# EAGLE board pi_head_imr_sensors (EAGLE 7.6.0)
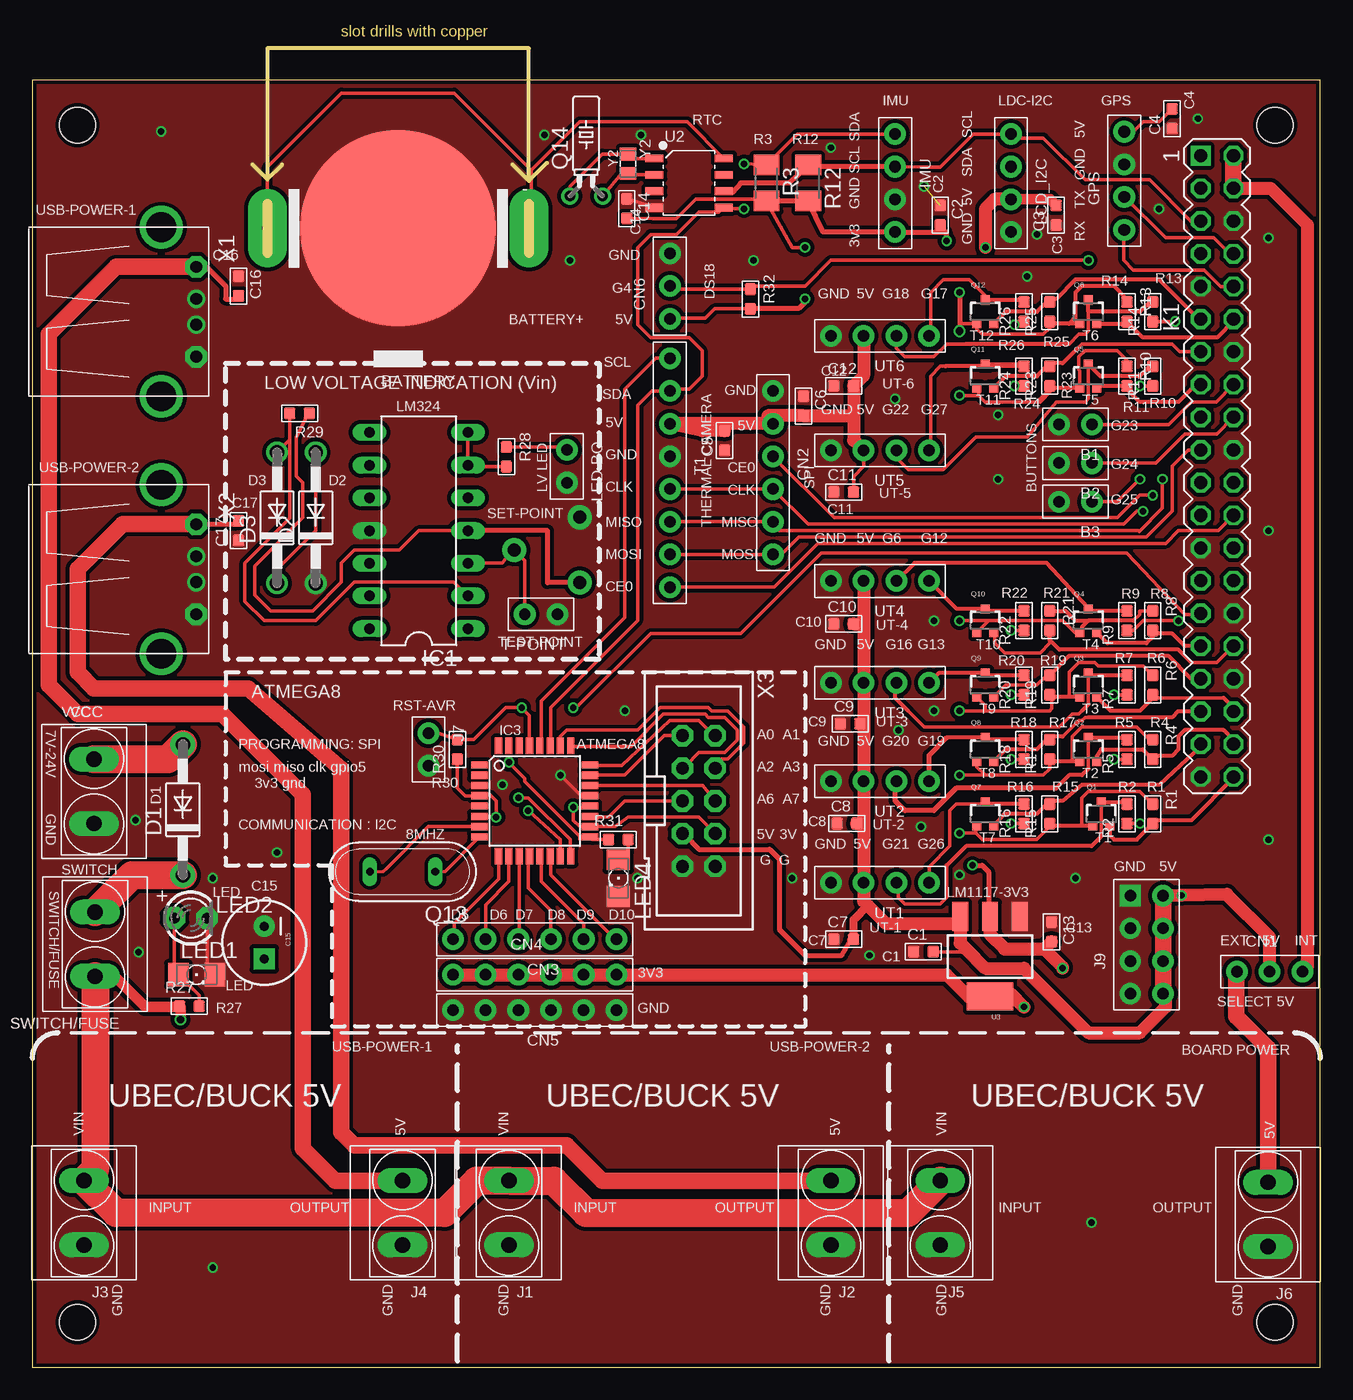
[diagram p0: board, top side]
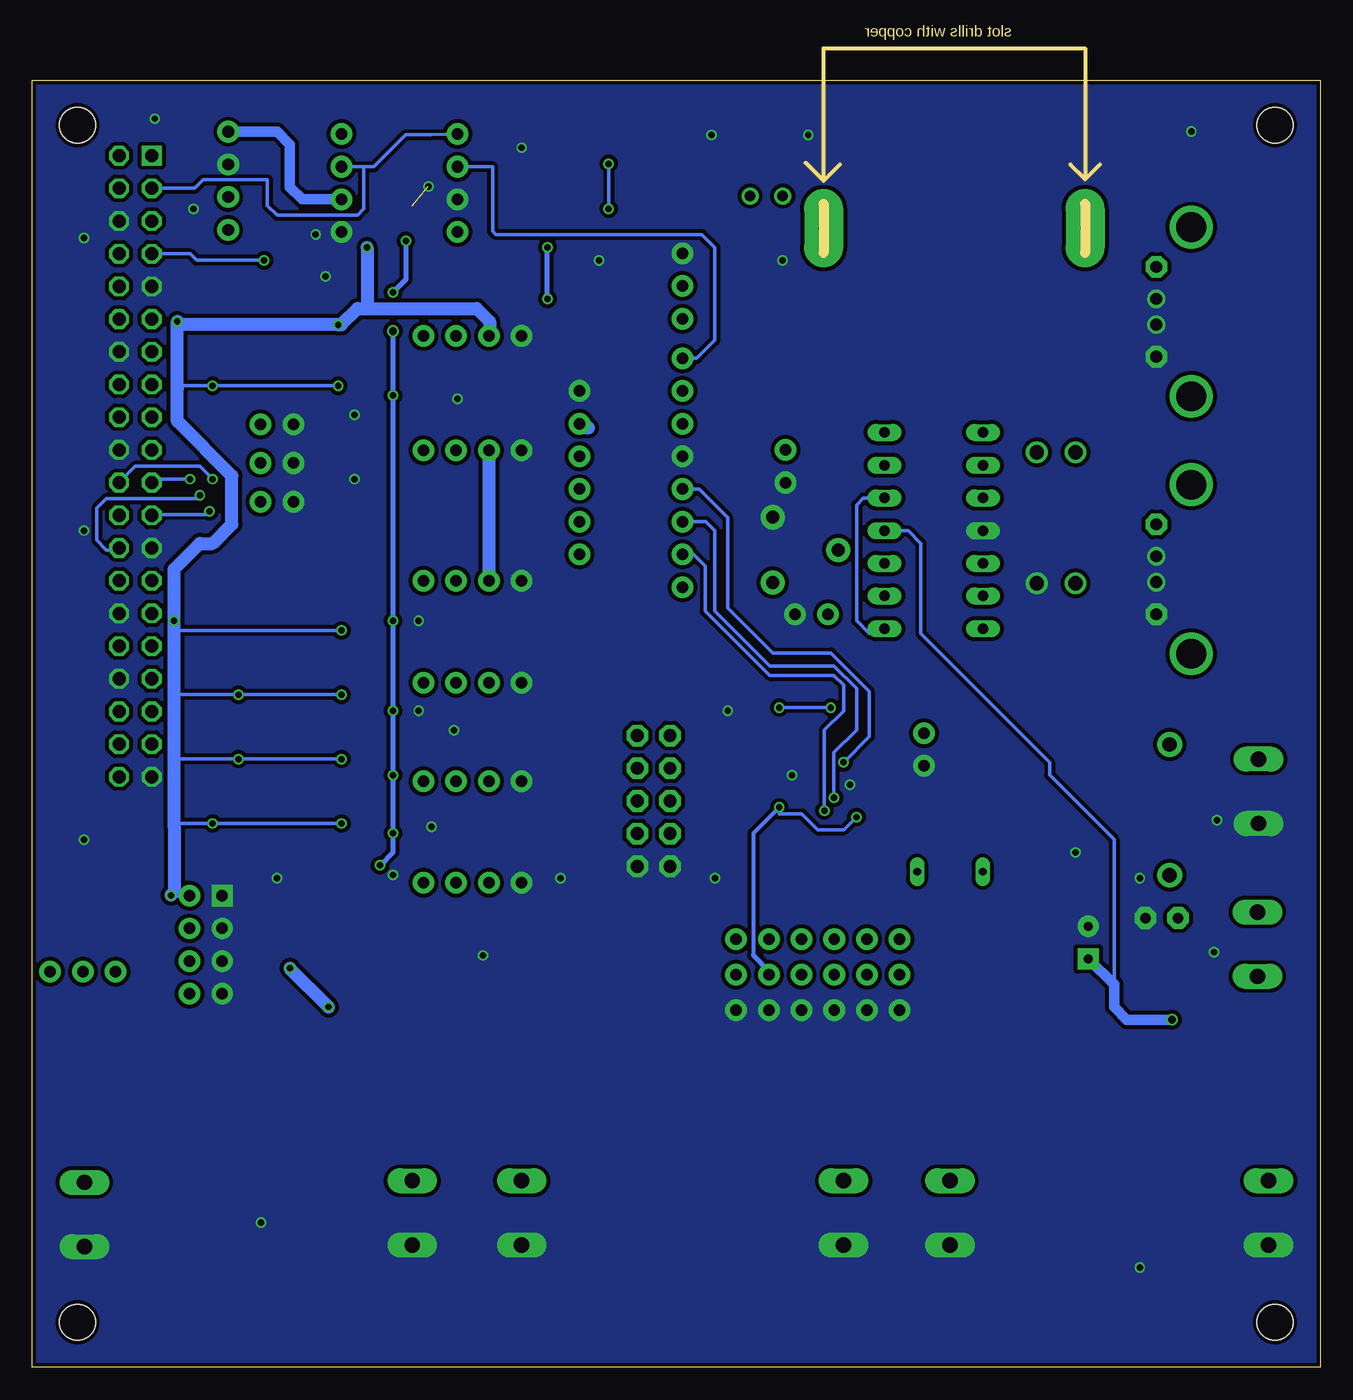
[diagram p1: board, bottom side, seen from below]

Size 100 x 100 mm. Coordinates in mm from the lower left corner, seen from the top.
Outline: 0,0 100,0 100,100 0,100 0,0
Copper layers (1*16): Top 0.035mm / dielectric 1.5mm / Bottom 0.035mm
Design rules "SeeedStudio_2layer_DRU_no_angle_20140221": minimum track width 6mil, minimum drill 12mil, track to track 6mil, track to pad 6mil, pad to pad 6mil, via to via 6mil, smd to smd 0mil, copper to edge 10mil, drill to drill 10mil, minimum pad ring 10mil, minimum via ring 6mil, stop-mask expansion 2mil, vias tented up to drill 100mil, thermal gap 10mil
Holes 2.8 mm at 3.5,96.5 3.5,3.5 96.5,3.5 96.5,96.5

## Footprints (pad centres in the part's own frame; a part is rotated, then mirrored left to right if it is on the bottom)
H2-2.54 = drill 0.889 pad 1.676: 1 0,1.27; 2 0,-1.27
BAT2P-20.32-CR2032 = smd 15.24 x 15.24: 1 0,0 | drill 0.762 pad 3.048 long: 2 -10.16,0; 3 10.16,0
C0603 = smd 0.889 x 0.889: 1 0,0.762; 2 0,-0.762
CPOL-RADIAL-100UF-25V = drill 0.7 pad 1.651 square: 1 1.27,0 | drill 0.7 pad 1.651: 2 -1.27,0
H3-2.54 = drill 0.889 pad 1.676: 1 0,2.54; 2 0,0; 3 0,-2.54
H6-2.54 = drill 0.889 pad 1.676: 1 0,6.35; 2 0,3.81; 3 0,1.27; 4 0,-1.27; 5 0,-3.81; 6 0,-6.35
DO41-10 = drill 1.118 pad 1.93: A 5.08,0; C -5.08,0
DO41-10' = drill 1.118: A 5.08,0; C -5.08,0
H4-2.54 = drill 0.9 pad 1.676: 1 0,3.81; 2 0,1.27; 3 0,-1.27; 4 0,-3.81
DIL14 = drill 0.813 long: 1 -7.62,-3.81; 2 -5.08,-3.81; 3 -2.54,-3.81; 4 0,-3.81; 5 2.54,-3.81; 6 5.08,-3.81; 7 7.62,-3.81; 8 7.62,3.81; 9 5.08,3.81; 10 2.54,3.81; 11 0,3.81; 12 -2.54,3.81; 13 -5.08,3.81; 14 -7.62,3.81
TQFP32-08 = smd 1.27 x 0.559: 1 -4.293,2.8; 2 -4.293,2; 3 -4.293,1.2; 4 -4.293,0.4; 5 -4.293,-0.4; 6 -4.293,-1.2; 7 -4.293,-2; 8 -4.293,-2.8; 17 4.293,-2.8; 18 4.293,-2; 19 4.293,-1.2; 20 4.293,-0.4; 21 4.293,0.4; 22 4.293,1.2; 23 4.293,2; 24 4.293,2.8 | smd 0.559 x 1.27: 9 -2.8,-4.293; 10 -2,-4.293; 11 -1.2,-4.293; 12 -0.4,-4.293; 13 0.4,-4.293; 14 1.2,-4.293; 15 2,-4.293; 16 2.8,-4.293; 25 2.8,4.293; 26 2,4.293; 27 1.2,4.293; 28 0.4,4.293; 29 -0.4,4.293; 30 -1.2,4.293; 31 -2,4.293; 32 -2.8,4.293
H2-5.0-10.5X8.0MM = drill 1.2 pad 1.93 long: 1 0,2.5; 2 0,-2.5
H2X4-2.54 = drill 0.889 pad 1.651 square: 1 -1.27,3.81 | drill 0.889 pad 1.651: 2 -1.27,1.27; 3 -1.27,-1.27; 4 -1.27,-3.81; 5 1.27,-3.81; 6 1.27,-1.27; 7 1.27,1.27; 8 1.27,3.81
PIN_20X2 = drill 1.016 square: 1 -24.13,-1.27 | drill 1.016 octagon: 2 -24.13,1.27; 3 -21.59,-1.27; 4 -21.59,1.27; 5 -19.05,-1.27; 6 -19.05,1.27; 7 -16.51,-1.27; 8 -16.51,1.27; 9 -13.97,-1.27; 10 -13.97,1.27; 11 -11.43,-1.27; 12 -11.43,1.27; 13 -8.89,-1.27; 14 -8.89,1.27; 15 -6.35,-1.27; 16 -6.35,1.27; 17 -3.81,-1.27; 18 -3.81,1.27; 19 -1.27,-1.27; 20 -1.27,1.27; 21 1.27,-1.27; 22 1.27,1.27; 23 3.81,-1.27; 24 3.81,1.27; 25 6.35,-1.27; 26 6.35,1.27; 27 8.89,-1.27; 28 8.89,1.27; 29 11.43,-1.27; 30 11.43,1.27; 31 13.97,-1.27; 32 13.97,1.27; 33 16.51,-1.27; 34 16.51,1.27; 35 19.05,-1.27; 36 19.05,1.27; 37 21.59,-1.27; 38 21.59,1.27; 39 24.13,-1.27; 40 24.13,1.27
LED_1206 = smd 1.6 x 1.803: A -1.422,0; C 1.422,0
LED3MM = drill 0.813 pad 1.676 octagon: A -1.27,0; K 1.27,0
SOT323 = smd 0.7 x 0.7: 1 -0.65,-0.925; 2 0.65,-0.925; 3 0,0.925
QS = drill 0.61 long: 1 -2.54,0; 2 2.54,0
TC26H = drill 0.813: 1 -1.27,0; 2 1.27,0
R0603 = smd 0.889 x 0.889: 1 0,0.762; 2 0,-0.762
M1206 = smd 1.6 x 2: 1 -1.4,0; 2 1.4,0
TRIM_POT = drill 1 pad 1.88: 1 5.08,0; 2 0,2.54; 3 0,-2.54
H8-2.54 = drill 0.889 pad 1.676: 1 0,8.89; 2 0,6.35; 3 0,3.81; 4 0,1.27; 5 0,-1.27; 6 0,-3.81; 7 0,-6.35; 8 0,-8.89
SOIC8-1.27-5X4MM = smd 0.6 x 1.4: 1 -1.905,-2.7; 2 -0.635,-2.7; 3 0.635,-2.7; 4 1.905,-2.7; 5 1.905,2.7; 6 0.635,2.7; 7 -0.635,2.7; 8 -1.905,2.7
SOT223 = smd 1.219 x 2.235: 1 -2.311,-3.099; 2 0,-3.099; 3 2.311,-3.099 | smd 3.6 x 2.2: 4 0,3.099
USB-A-H = drill 0.914: D+ 2.718,-1.003; D- 2.718,1.003 | drill 0.914 pad 1.676 octagon: GND 2.718,-3.493; VBUS 2.718,3.493 | drill 2.311: P$5 0,-6.566; P$6 0,6.566
PAK100/2500-10 = drill 1 pad 1.676 octagon: 1 -5.08,-1.27; 2 -5.08,1.27; 3 -2.54,-1.27; 4 -2.54,1.27; 5 0,-1.27; 6 0,1.27; 7 2.54,-1.27; 8 2.54,1.27; 9 5.08,-1.27; 10 5.08,1.27
X2-SMD-L2.0X1.2X0.55MM = smd 1 x 1.25: 1 -0.75,0; 2 0.75,0

## Placement (x,y rotation side)
B1  2P-2.54  [H2-2.54]  81,73.25 90 top
B2  2P-2.54  [H2-2.54]  81,70.25 90 top
B3  2P-2.54  [H2-2.54]  81,67.25 90 top
BATTERY  cr2032  [BAT2P-20.32-CR2032]  28.4,88.49 180 top
C1  1nf  [C0603]  69.19,32.29 90 top
C2  1nf  [C0603]  70.5,89.5 0 top
C3  1nf  [C0603]  79.5,89.5 180 top
C4  1nf  [C0603]  88.5,97 180 top
C5  1nf  [C0603]  53.75,72 180 top
C6  1nf  [C0603]  59.88,74.68 0 top
C7  1nf  [C0603]  63,33.25 90 top
C8  1nf  [C0603]  63.25,42.25 90 top
C9  1nf  [C0603]  63.5,50 90 top
C10  1nf  [C0603]  63,57.75 90 top
C11  1nf  [C0603]  63,68 90 top
C12  1nf  [C0603]  63,76.25 90 top
C13  1nf  [C0603]  79.15,33.83 0 top
C14  1nf  [C0603]  46.15,90.02 0 top
C15  [CPOL-RADIAL-100UF-25V]  18,33 270 top
C16  1nf  [C0603]  16,84 0 top
C17  1nf  [C0603]  16,65 180 top
CN1  3p-2.54  [H3-2.54]  96.08,30.74 270 top
CN2  6p-2.54  [H6-2.54]  57.5,69.5 180 top
CN3  6p-2.54  [H6-2.54]  39,33.25 90 top
CN4  6p-2.54  [H6-2.54]  39,30.5 270 top
CN5  6p-2.54  [H6-2.54]  39,27.75 90 top
CN6  3p-2.54  [H3-2.54]  49.5,84 0 top
D1  1N4004  [DO41-10]  11.68,43.31 90 top
D2  1N4004  [DO41-10']  22,66 90 top
D3  1N4004  [DO41-10']  19,66 90 top
GPS  4p-2.54  [H4-2.54]  84.79,92.18 0 top
IC1  LM324P  [DIL14]  30,65 90 top
IC3  MEGA8-AI  [TQFP32-08]  39,44 0 top
IMU  4p-2.54  [H4-2.54]  67,92 180 top
J1  GREEN-2P-5.0  [H2-5.0-10.5X8.0MM]  37,12 180 top
J2  GREEN-2P-5.0  [H2-5.0-10.5X8.0MM]  62,12 180 top
J3  GREEN-2P-5.0  [H2-5.0-10.5X8.0MM]  4,12 180 top
J4  GREEN-2P-5.0  [H2-5.0-10.5X8.0MM]  28.75,12 180 top
J5  GREEN-2P-5.0  [H2-5.0-10.5X8.0MM]  70.5,12 180 top
J6  GREEN-2P-5.0  [H2-5.0-10.5X8.0MM]  95.96,11.87 180 top
J7  2p-2.54  [H2-2.54]  30.75,48 180 top
J9  2X4P-2.54  [H2X4-2.54]  86.53,32.83 0 top
K1  PIN20X2  [PIN_20X2]  92,70 270 top
LCD_I2C  4p-2.54  [H4-2.54]  76,92 180 top
LED1  [LED_1206]  12.75,30.5 0 top
LED2  [LED3MM]  12.3,34.91 0 top
LED4  [LED_1206]  45.5,38 270 top
LED-BO  2p-2.54  [H2-2.54]  41.5,70 180 top
Q1  MOSFET-NCHANNEL2N7002PW  [SOT323]  83,43 0 top
Q2  MOSFET-NCHANNEL2N7002PW  [SOT323]  82,48 0 top
Q3  MOSFET-NCHANNEL2N7002PW  [SOT323]  82,53 0 top
Q4  MOSFET-NCHANNEL2N7002PW  [SOT323]  82,58 0 top
Q5  MOSFET-NCHANNEL2N7002PW  [SOT323]  82,77 0 top
Q6  MOSFET-NCHANNEL2N7002PW  [SOT323]  82,82 0 top
Q7  MOSFET-NCHANNEL2N7002PW  [SOT323]  74,43 0 top
Q8  MOSFET-NCHANNEL2N7002PW  [SOT323]  74,48 0 top
Q9  MOSFET-NCHANNEL2N7002PW  [SOT323]  74,53 0 top
Q10  MOSFET-NCHANNEL2N7002PW  [SOT323]  74,58 0 top
Q11  MOSFET-NCHANNEL2N7002PW  [SOT323]  74,77 0 top
Q12  MOSFET-NCHANNEL2N7002PW  [SOT323]  74,82 0 top
Q13  [QS]  28.75,38.5 180 top
Q14  [TC26H]  43,91 0 top
R1  270K 1/10W  [R0603]  87,43 180 top
R2  270K 1/10W  [R0603]  85,43 0 top
R3  R  [M1206]  57,92 270 top
R4  270K 1/10W  [R0603]  87,48 180 top
R5  270K 1/10W  [R0603]  85,48 0 top
R6  270K 1/10W  [R0603]  87,53 180 top
R7  270K 1/10W  [R0603]  85,53 0 top
R8  270K 1/10W  [R0603]  87,58 180 top
R9  270K 1/10W  [R0603]  85,58 0 top
R10  270K 1/10W  [R0603]  85,77 180 top
R11  270K 1/10W  [R0603]  87,77 0 top
R12  R  [M1206]  60.25,92 270 top
R13  270K 1/10W  [R0603]  85,82 180 top
R14  270K 1/10W  [R0603]  87,82 0 top
R15  270K 1/10W  [R0603]  79,43 0 top
R16  270K 1/10W  [R0603]  77,43 0 top
R17  270K 1/10W  [R0603]  79,48 0 top
R18  270K 1/10W  [R0603]  77,48 0 top
R19  270K 1/10W  [R0603]  79,53 0 top
R20  270K 1/10W  [R0603]  77,53 0 top
R21  270K 1/10W  [R0603]  79,58 180 top
R22  270K 1/10W  [R0603]  77,58 0 top
R23  270K 1/10W  [R0603]  79,77 0 top
R24  270K 1/10W  [R0603]  77,77 0 top
R25  270K 1/10W  [R0603]  79,82 0 top
R26  270K 1/10W  [R0603]  77,82 0 top
R27  1k  [R0603]  12.18,28.05 270 top
R28  1k  [R0603]  36.81,70.74 180 top
R29  1k  [R0603]  20.74,74.11 90 top
R30  1k  [R0603]  33,48 0 top
R31  1k  [R0603]  45.5,41 270 top
R32  1k  [R0603]  55.75,83 180 top
RV1  [TRIM_POT]  42.5,63.5 180 top
SWITCH/FUSE  GREEN-2P-5.0  [H2-5.0-10.5X8.0MM]  4.87,32.87 180 top
T1  YELLOW-8P-2.54  [H8-2.54]  49.5,69.5 180 top
T-POINT  2P-2.54  [H2-2.54]  39.5,58.5 90 top
U2  DS13337S+-SOIC8  [SOIC8-1.27-5X4MM]  51,92 270 top
U3  [SOT223]  74.36,31.92 180 top
UT1  4p-2.54  [H4-2.54]  65.82,37.64 90 top
UT2  4p-2.54  [H4-2.54]  65.82,45.54 90 top
UT3  4p-2.54  [H4-2.54]  65.82,53.19 90 top
UT4  4p-2.54  [H4-2.54]  65.82,61.09 90 top
UT5  4p-2.54  [H4-2.54]  65.82,71.24 90 top
UT6  4p-2.54  [H4-2.54]  65.82,80.14 90 top
VCC  GREEN-2P-5.0  [H2-5.0-10.5X8.0MM]  4.77,44.75 0 top
X1  [USB-A-H]  10,82 0 top
X2  [USB-A-H]  10,62 0 top
X3  2510-  [PAK100/2500-10]  51.75,44 270 top
Y2  3.2768KHZ  [X2-SMD-L2.0X1.2X0.55MM]  46.25,93.5 270 top

## Library data of the parts
B1-B3 T-POINT = Seeed-Connector -2016; MPN: P125-1102A0BS116A3
BATTERY = Seeed-OPL-Connector
C1 C2 = Seeed-Capacitor-2016; MPN: CC0603KRX7R9BB102
C3-C14 C16 C17 = Seeed-Capacitor-2016; MPN: GRM1885C1H102JA01D
C15 = SparkFun-Capacitors
CN1 CN6 J1-J6 J9 SWITCH/FUSE VCC = Seeed-Connector -2016
CN2-CN5 = Seeed-Connector -2016; MPN: F185-1106A1BSYC1
D1 LED2 R3 R12 = adafruit
D2 D3 = diode
GPS IMU LCD_I2C UT1-UT6 = Seeed-Connector -2016; MPN: F185-1104A1BSYA1
IC1 = lm324
IC3 = atmel; MPN: ATMEGA8-16AU; OC_FARNELL: 9171371; OC_NEWARK: 73M8863
J7 LED-BO = Seeed-Connector -2016; MPN: P125-1102A0BS116A1
K1 = FLYFISH
LED1 LED4 = eagle-ltspice; SPICEMODEL: NONE; SPICEPREFIX: D; SPICETYPE: diode
Q1-Q12 = SparkFun-DiscreteSemi; PROD_ID: TRANS-11151
Q13 = special
Q14 = crystal; OC_FARNELL: unknown; OC_NEWARK: unknown
R1 R2 R4-R11 R13-R26 = Seeed-OPL-Resistor; MPN: RC0603FR-07270KL
R27-R32 = Seeed-Resistor-2016; MPN: RC0603JR-070RL
RV1 = SparkFun-Electromechanical
T1 = Seeed-Connector -2016; MPN: F185-1108A1BSYC1
U2 = Seeed-OPL-ic; MPN: DS1337S+
U3 = SparkFun-PowerIC; PROD_ID: VREG-08170
X1 X2 = con-usb-3
X3 = con-3m; MF: 3M; MPN: 2510-6002UB; OC_FARNELL: 9838244; OC_NEWARK: 46F4725
Y2 = Seeed-OPL-crystal-osctllator; MPN: FC-12M

## Nets
3V3: C2.2 C13.2 C14.2 CN4.1 CN4.2 CN4.3 CN4.4 CN4.5 CN4.6 CN6.3 IC3.4 IC3.6 IC3.18 IC3.20 IMU.1 Q1.1 Q2.1 Q3.1 Q4.1 Q5.1 Q6.1 Q7.1 Q8.1 Q9.1 Q10.1 Q11.1 Q12.1 R1.2 R3.2 R4.2 R6.2 R8.2 R10.2 R12.2 R13.2 R15.2 R17.2 R19.2 R21.2 R23.2 R25.2 R30.2 R32.1 U3.2 U3.4 X3.8
5V: C1.2 C3.2 C4.2 C5.2 C6.2 C7.2 C8.2 C9.2 C10.2 C11.2 C12.2 CN1.2 CN2.5 GPS.1 J9.5 J9.6 J9.7 J9.8 LCD_I2C.2 R2.2 R5.2 R7.2 R9.2 R11.2 R14.2 R16.2 R18.2 R20.2 R22.2 R24.2 R26.2 T1.6 U3.3 UT1.2 UT2.2 UT3.2 UT4.2 UT5.2 UT6.2 X3.7
ADC0: IC3.23 X3.1
ADC1: IC3.24 X3.2
ADC2: IC3.25 X3.3
ADC3: IC3.26 X3.4
ADC6: IC3.19 X3.5
ADC7: IC3.22 X3.6
BROWN-OUT: IC1.6 IC1.7 R28.1
BUCK-5V: CN1.3 J6.2
BUTT1: B1.2 K1.16
BUTT2: B2.2 K1.18
BUTT3: B3.2 K1.22
CE0: K1.24 T1.1
CE1: CN2.4 K1.26
CLK: CN2.3 IC3.17 K1.23 R31.2 T1.4
D5: CN3.1 IC3.9
D6: CN3.2 IC3.10
D7: CN3.3 IC3.11
D8: CN3.4 IC3.12
D9: CN3.5 IC3.13
D10: CN3.6 IC3.14
DS18: CN6.2 K1.7 R32.2
GND: B1.1 B2.1 B3.1 BATTERY.1 C1.1 C2.1 C3.1 C4.1 C5.1 C6.1 C7.1 C8.1 C9.1 C10.1 C11.1 C12.1 C13.1 C14.1 C15.2 C16.1 C17.1 CN2.6 CN5.1 CN5.2 CN5.3 CN5.4 CN5.5 CN5.6 CN6.1 D2.C GPS.2 IC1.11 IC3.3 IC3.5 IC3.21 IMU.2 J1.1 J2.1 J3.1 J4.1 J5.1 J6.1 J7.1 J9.1 J9.2 J9.3 J9.4 K1.6 K1.9 K1.14 K1.20 K1.25 K1.30 K1.34 K1.39 LCD_I2C.1 LED1.C LED2.K LED4.C LED-BO.1 RV1.3 T1.5 T-POINT.2 U2.4 U3.1 UT1.1 UT2.1 UT3.1 UT4.1 UT5.1 UT6.1 VCC.2 X1.D+ X1.D- X1.GND X2.D+ X2.D- X2.GND X3.9 X3.10
HUB-5V: C17.2 J2.2 X2.VBUS
MISO: CN2.2 IC3.16 K1.21 T1.3
MOSI: CN2.1 IC3.15 K1.19 T1.2
N$1: LED4.A R31.1
N$2: D1.A VCC.1
N$3: D1.C SWITCH/FUSE.2
N$4: D2.A D3.C
N$6: D3.A IC1.2 R29.1
N$7: IC1.3 RV1.1 T-POINT.1
N$8: IC1.1 IC1.5
N$9: BATTERY.2 BATTERY.3 U2.8
N$10: LED-BO.2 R28.2
N$11: LED1.A LED2.A R27.1
N$12: Q14.1 U2.1 Y2.1
N$13: IC3.7 Q13.2
N$14: IC3.8 Q13.1
N$15: Q14.2 U2.2 Y2.2
PI-5V: CN1.1 K1.2 K1.4
RASPI-5V: C16.2 J4.2 X1.VBUS
RST: IC3.29 J7.2 K1.29 R30.1
RX: GPS.4 K1.10
SCL: IC3.28 IMU.3 K1.5 LCD_I2C.4 R12.1 T1.8 U2.6
SDA: IC3.27 IMU.4 K1.3 LCD_I2C.3 R3.1 T1.7 U2.5
TX: GPS.3 K1.8
UT11-IN: K1.40 Q1.2 R1.1
UT11-OUT: Q1.3 R2.1 UT1.3
UT12-IN: K1.37 Q7.2 R15.1
UT12-OUT: Q7.3 R16.1 UT1.4
UT21-IN: K1.38 Q2.2 R4.1
UT21-OUT: Q2.3 R5.1 UT2.3
UT22-IN: K1.35 Q8.2 R17.1
UT22-OUT: Q8.3 R18.1 UT2.4
UT31-IN: K1.36 Q3.2 R6.1
UT31-OUT: Q3.3 R7.1 UT3.3
UT32-IN: K1.33 Q9.2 R19.1
UT32-OUT: Q9.3 R20.1 UT3.4
UT41-IN: K1.31 Q4.2 R8.1
UT41-OUT: Q4.3 R9.1 UT4.3
UT42-IN: K1.32 Q10.2 R21.1
UT42-OUT: Q10.3 R22.1 UT4.4
UT51-IN: K1.15 Q5.2 R10.1
UT51-OUT: Q5.3 R11.1 UT5.3
UT52-IN: K1.13 Q11.2 R23.1
UT52-OUT: Q11.3 R24.1 UT5.4
UT61-IN: K1.12 Q6.2 R13.1
UT61-OUT: Q6.3 R14.1 UT6.3
UT62-IN: K1.11 Q12.2 R25.1
UT62-OUT: Q12.3 R26.1 UT6.4
VIN: C15.1 IC1.4 J1.2 J3.2 J5.2 R27.2 R29.2 RV1.2 SWITCH/FUSE.1

## Tracks (layer width: path | path; a pad name or v marks a point on that pad's centre or on a via)
3V3  (via drill 0.5, 0.6)
  Top 0.254: 74.28,58 80,58 80.92,57.08 Q4.1 | 74.28,58 Q10.1 | 79.16,52.08 79.16,51.16 79,51 74,51 | 74,51 74,51.42 Q9.1 | Q8.1 73.35,46.65 74,46 | 74,46 78.5,46 79,46.5 R17.2 | R15.2 79,42 78,41 73.75,41 73.25,41.5 | 73.25,41.5 73.25,41.98 Q7.1 | R25.2 79,80.75 78.5,80.25 73.75,80.25 73.35,80.65 Q12.1 72.08,81.08 v72,80.5 | 79.16,76.08 79.16,75.91 78.25,75 78,75 | 73.5,75.5 73.5,75.92 Q11.1 | 74.25,35.13 U3.2 | 73.25,41.5 v72,41.5 | 74,46 v72,46 | 74,51 v72,51 | 74.28,58 v72,58 | Q5.1 81.35,77.4 81.25,77.5 81.25,78.5 81.75,79 84.25,79 85,78.25 R10.2 | R23.2 79,76 78,75 | 78,75 74,75 73.5,75.5 | 73.5,75.5 v72,75.5 | R1.2 86.99,43.76 86,44.75 82,44.75 81.5,44.25 81.5,42.08 | R4.2 86.74,48.76 85.75,49.75 81.5,49.75 80.75,49 80.75,47.08 | R6.2 86.99,53.76 86.25,54.5 82.75,54.5 82.5,54.75 81.25,54.75 80.5,54 80.5,52.08 | 86.76,58.76 86.01,58.76 86,58.75 86,58.5 85.5,58 | 70.95,88.19 C2.2 | 70.95,87.55 v71,87.5 | C14.2 48.16,89.25 50,89.25 51.5,90.75 58,90.75 58.15,90.6 R3.2 59,87 v60,87 | v42,43.5 42,42.5 42.5,42 IC3.18 45.25,42 46.25,42.75 51.75,42.75 53.02,41.48 X3.8 | v36,42.75 34.76,42.75 IC3.6 35.95,42.8 v36,42.75 | v36,42.75 36,44 35.5,44.5 34.81,44.5 IC3.4 33.6,44.4 33,45 R30.2 | R32.1 52.99,82.24 52.25,81.5 49.54,81.5 CN6.3
  Top 0.305: Q1.1 81.5,42.08 79.16,42.08 R15.2 | Q2.1 80.75,47.08 79.16,47.08 R17.2 | Q3.1 80.5,52.08 79.16,52.08 R19.2 | R8.2 86.76,58.76 | 85.5,58 82,58 | 82,58 81.5,57.5 81.5,57.23 Q4.1 | R21.2 80.24,58.76 81,58 82,58 | Q5.1 79.16,76.08 R23.2 | Q6.1 80.5,81.08 | 80.5,81.08 79.16,81.08 R25.2 | R13.2 85,83 84,84 81.5,84 81,83.5 81,81.58 80.5,81.08 | v42,43.5 43.19,43.5
  Top 0.406: 74.25,35.13 74.25,38.5 73.75,39 v73,39 | v72,83.5 v72,80.5 | 70.95,87.55 70.95,88.19 IMU.1 61.41,88.19 R12.2 R3.2 | 43.19,43.5 IC3.20 | v60,83 60,82.75 59.5,82.25 58.76,82.25 R32.1
  Top 1.016: U3.2 74.36,33.64 75.5,32.5 78.58,32.5 | 78.58,32.5 C13.2 | CN4.6 CN4.5 CN4.4 CN4.3 CN4.2 | CN4.2 CN4.1 | 74.18,29 73,29 72.75,28.75 71,30.5 CN4.2 | 74.18,29 U3.4 | 74.18,29 76,29 v77,28 | v80,31 80,31.08 78.58,32.5
  Bottom 0.254: v36,42.75 37,41.75 39,41.75 40.25,43 42,43 v42,43.5
  Bottom 0.305: 44,32 44,41.5 v42,43.5
  Bottom 0.406: v72,80.5 v72,75.5 v72,58 v72,51 v72,46 v72,41.5 72,40 v73,39 | v71,87.5 71,84.5 v72,83.5 | CN4.2 42.81,30.81 44,32 | v60,83 v60,87
  Bottom 1.016: v77,28 v80,31
5V  (via drill 0.5)
  Top 0.254: R14.2 88.74,81.24 v88.75,81.25 | R26.2 76.49,81.24 v76.25,81 | R9.2 85.49,57.24 86.25,58 v89,58 | R22.2 76.01,57.24 v76,57.25 | R7.2 84.01,52.24 v84,52.25 | R20.2 76.26,52.24 v76,52.25 | R18.2 76.01,47.24 v76,47.25 | R5.2 84.01,47.24 v84,47.25 | R16.2 76.01,42.24 v76,42.25 | R2.2 85.99,42.24 v86,42.25 | R24.2 76.26,76.24 v76.25,76.25 | R11.2 86.01,76.24 v86,76.25 | C11.2 63.76,69.21 64.55,70 UT5.2 | C1.2 72.29,32.29 72.5,32.5 | GPS.1 85.49,95.99 86.25,96.75 87.49,96.75 C4.2 | C9.2 64.26,52.9 UT3.2
  Top 0.406: X3.7 50.73,41.27 51.75,40.25 57.25,40.25 58,39.5 58,34 60,32 62.86,32 63.56,33.2
  Top 0.61: 64.88,35.88 63.76,34.76 C7.2 63.56,33.2
  Top 0.813: LCD_I2C.2 79.03,90.73 C3.2
  Top 1.016: J9.5 88,28.82 88,28 86,26 82,26 77,31 74,31 72.5,32.5 72.05,32.95 U3.3 71.98,34.95 | C5.2 52.05,72.76 T1.6 CN2.5 57.11,73.92 C6.2 63.68,73.92 63.76,74 | CN1.2 96.08,33.42 92.75,36.75 v89.25,36.66 J9.8 | LCD_I2C.2 74.73,90.73 74,90 v74,87 | UT6.2 64.55,77.04 C12.2 63.76,74 | 63.76,74 63.76,72.03 UT5.2 | UT4.2 64.55,58 | 64.55,58 UT3.2 UT2.2 64.55,42 | C10.2 64.3,57.75 64.55,58 | 64.55,42 UT1.2 64.55,36.2 64.88,35.88 66.25,34.5 71.75,34.5 | C8.2 64.3,42.25 64.55,42 | 71.75,34.5 72,34.25 72,34.5 71.75,34.5
  Top 1.27: J9.5 J9.6 J9.7 J9.8
  Bottom 0.254: 88.5,81 v88.75,81.25 | v76,57.25 89,57.25 | v76,52.25 v84,52.25 88.75,52.25 89,52 | v76,47.25 v84,47.25 89,47.25 | v76,42.25 v86,42.25 88.75,42.25 89,42 | v76.25,76.25 v86,76.25 | v86,76.25 88.75,76.25 | v86,76.25 88.5,76.25 88.75,76
  Bottom 0.813: GPS.1 80.99,95.99 80,95 80,91.7 79.03,90.73 LCD_I2C.2
  Bottom 1.016: 57,73 56.81,73 CN2.5 | v88.75,81.25 88.75,76.25 88.75,76 88.75,73.5 84.5,69.25 84.5,65.5 86,64 87,64 89,62 v89,58 89,57.25 89,52 89,47.25 89,42 89,36.91 v89.25,36.66 | 88.5,81 v76.25,81 76,81 74.75,82.25 74,82.25 | v74,87 74,82.25 | 74,82.25 65.5,82.25 64.5,81.25 64.5,80.19 UT6.2 | UT5.2 UT4.2
ADC0
  Top 0.254: X3.1 49.08,49.08 46,46 IC3.23
ADC1
  Top 0.254: X3.2 52.92,49.08 51.75,50.25 49.5,50.25 45.75,46.75 43.34,46.75 IC3.24
ADC2
  Top 0.254: X3.3 50.73,46.73 51.75,47.75 53.75,47.75 54.75,48.75 54.75,49.5 53.75,50.5 52.5,50.5 52.25,50.75 49,50.75 46.5,48.25 41.84,48.25 IC3.25
ADC3
  Top 0.254: IC3.26 41,49 41.5,49.5 47,49.5 48.75,51.25 52.5,51.25 52.75,51 54,51 55.25,49.75 55.25,48.5 54,47.25 53.5,47.25 53.25,47 53.25,46.56 X3.4
ADC6
  Top 0.254: X3.5 46,44 44.75,42.75 43.34,42.75 IC3.19
ADC7
  Top 0.254: IC3.22 52.07,45.2 X3.6
BROWN-OUT
  Top 0.254: IC1.7 IC1.6 33.91,69.98 R28.1
BUCK-5V
  Top 1.27: J6.2 95.96,24.79 93.5,27.25 93.5,30.7 CN1.3
BUTT1
  Top 0.254: B1.2 88.25,73.25 90,75 91.92,75 K1.16
BUTT2
  Top 0.254: B2.2 87.25,70.25 89.5,72.5 91.96,72.5 K1.18
BUTT3  (via drill 0.5)
  Top 0.254: B3.2 84.25,67.25 v86,69
  Bottom 0.254: v86,69 87,70 92,70 K1.22
CE0
  Top 0.254: T1.1 57.61,60.61 61,64 88,64 89,65 92.08,65 K1.24
CE1  (via drill 0.5)
  Top 0.254: CN2.4 62.27,66 84.25,66 86,67.75 v87,67.75
  Bottom 0.254: K1.26 93.42,63.5 94.25,63.5 95,64.25 95,66.75 94.25,67.5 87.25,67.5 v87,67.75
CLK  (via drill 0.5)
  Top 0.254: T1.4 CN2.3 60.23,65.5 84.75,65.5 85.75,66.5 v86.25,66.5 | 37,46.75 v37,47 38.25,45.75 38.25,45.5 42.5,41.25 | 42.5,41.25 43.24,41.25 IC3.17 43.49,41 R31.2 | 42.5,41.25 42.5,41.01
  Bottom 0.254: v86.25,66.5 86.5,66.25 90.67,66.25 K1.23 | T1.4 48.23,68.23 46,66 46,59 42.5,55.5 38,55.5 35,52.5 35,49 v37,47
D5
  Top 0.254: IC3.9 36.2,37.95 32.75,34.5 32.75,33.1 CN3.1
D6
  Top 0.254: CN3.2 35.19,35.94 37,37.75 IC3.10
D7
  Top 0.254: IC3.11 37.8,33.07 CN3.3
D8
  Top 0.254: CN3.4 40.27,35.48 38.5,37.25 38.5,39.61 IC3.12
D9
  Top 0.254: CN3.5 42.81,34.44 39.5,37.75 39.5,39.61 IC3.13
D10
  Top 0.254: CN3.6 45.35,33.15 40.25,38.25 40.25,39.66 IC3.14
DS18  (via drill 0.5)
  Top 0.254: v82,86 62,86 60,84 55.99,84 R32.2 49.74,83.76 CN6.2
  Bottom 0.254: v82,86 87.25,86 87.75,86.5 K1.7
GND  (via drill 0.5)  (1 unrouted)
  Top 0.254: U2.4 48.46,90.09 C14.1 | LED2.K 13.57,31.1 LED1.C | IC3.21 42.6,44.4 v41,46
  other vias: 10,96 39.75,95.75 62,94.75 77.25,84.75 78,88 87.5,90 90.5,97 82.25,11.25 14,7.75 72,38.25 69,42 70,51 70,58 46,51 36.5,45.25 65,32 41.75,86 56,86 47.25,95.75 14,38 19,40 8.25,32.25 8,42.5 47,38 59,38 81,38 96,41 96,65 96,87.75 75,69 75,74 67.25,49.5 67,75.25 69.25,91.75
  pour Top (isolate 0.305, no thermals): 0,102 102,102 102,83 102,0 102,-3 -3,-3 -3,-2 -2,-2 -2,102
  pour Bottom (isolate 0.305, no thermals): -9,106 105,106 105,80 105,-3 -10,-3 -10,-1 -10,106
HUB-5V
  Top 0.406: X2.VBUS 15.73,65.49 C17.2
  Top 1.27: J2.2 44.25,14.5 41.5,17.25 25,17.25 24,18.25 24,46.5 16.75,52.75 4.75,52.75 3.5,54 3.5,62 7,65.5 X2.VBUS
MISO  (via drill 0.5)
  Top 0.254: T1.3 CN2.2 57.31,65.69 58,65 85.88,65 85.94,64.94 87.75,66.75 v87.75,69 | IC3.16 41.75,39.76 41.75,41 38.5,44.25 v37.75,44.25
  Bottom 0.254: v87.75,69 90.46,69 K1.21 | T1.3 47.69,65.69 47,65 47,58.75 42.75,54.5 37.75,54.5 36,52.75 36,49.5 37.75,47.75 v37.75,44.25
MOSI  (via drill 0.5)
  Top 0.254: K1.19 90.71,71.25 89.75,71.25 88.5,70 88.5,66.5 86.5,64.5 59.5,64.5 58.15,63.15 CN2.1 T1.2 | v38.5,43.25 41,41 IC3.15
  Bottom 0.254: T1.2 48.65,63.15 47.75,62.25 47.75,58.75 42.75,53.75 37.75,53.75 37,53 37,51 38.5,49.5 v38.5,43.25
N$1
  Top 0.254: R31.1 46.26,39.93 LED4.A
N$2
  Top 2.184: VCC.1 10.54,47.25 D1.A
N$3
  Top 2.184: D1.C 7.73,38.23 SWITCH/FUSE.2
N$4
  Top 0.254: D2.A 22,65 19,62 D3.C
N$6
  Top 0.254: R29.1 19.98,72.06 | 19.98,72.06 D3.A | IC1.2 32.73,61 25,61 22,58 18,58 16.5,59.5 16.5,62.5 19.98,65.98 19.98,72.06
N$7
  Top 0.254: IC1.3 33.85,62.5 36.5,62.5 37.25,63.5 RV1.1 38.23,62.69 T-POINT.1
N$8
  Bottom 0.254: IC1.5 35.46,67.54 36,67 36,58 35,57 34.19,57 IC1.1
N$9
  Top 0.254: 38.56,89.06 BATTERY.2 38.75,88.68 38.75,93 | U2.8 50.85,96.75 42.5,96.75 38.75,93 | BATTERY.3 18.24,93.24 24,99 32.75,99 38.75,93
N$10
  Top 0.254: R28.2 41.27,71.5 LED-BO.2
N$11
  Top 0.254: LED2.A 11.03,30.8 LED1.A 12.94,28.89 R27.1
N$12
  Top 0.254: U2.1 46.59,93.91 Y2.1 44.25,94.25 41.75,91.75 Q14.1
N$13
  Top 0.254: IC3.7 30.75,42 27.5,38.75 27.25,38.54 Q13.2
N$14
  Top 0.254: Q13.1 32.04,38.53 IC3.8
N$15
  Top 0.254: U2.2 46.62,92.64 Y2.2 45.77,92.75 Q14.2
PI-5V
  Top 1.016: K1.4 96.16,91.59 99,88.75 99,31.12 CN1.1
  Top 1.27: K1.2 K1.4
RASPI-5V
  Top 0.406: X1.VBUS 13.51,85.49 15,84 15,83 15.76,83 C16.2
  Top 1.27: J4.2 23.5,14.5 21,17 21,44.5 14.75,50.75 3.5,50.75 1.25,53 1.25,80.25 6.5,85.5 X1.VBUS
RST  (via drill 0.5)
  Top 0.254: IC3.29 38.6,50.65 v38,51.25 36.75,51.25 34.26,48.76 R30.1 31.49,49.27 J7.2 | v42,51.25 42.25,51.25 48,57 55,57 61.25,63.25 85,63.25 89.5,58.5 90.66,58.5 K1.29
  Bottom 0.254: v38,51.25 v42,51.25
RX
  Top 0.254: K1.10 92.28,83.97 91,85.25 85.5,85.25 84.75,86 84.75,88.33 GPS.4
SCL
  Top 0.254: K1.5 89.95,89.05 86.75,92.25 81.75,92.25 78.5,95.5 76.31,95.5 LCD_I2C.4 73.06,95.81 70.5,93.25 69.02,93.25 IMU.3 66.77,93.27 | T1.8 48.39,78.39 46,76 46,58.25 39.5,51.75 39.5,48.39 IC3.28
  Top 0.406: 66.77,93.27 61.13,93.27 R12.1 60.4,93.4 58.75,92 55,92 54.34,91.25 U2.6
  Bottom 0.254: IMU.3 64.25,93.27 64.25,88.25 64,88 48,88 47,87 47,79.78 48.39,78.39 T1.8
SDA  (via drill 0.5)
  Top 0.254: IMU.4 59.41,95.81 R3.1 57.35,93.4 v55.25,93.5 | v55.25,90 54.55,90 U2.5 53.3,89.75 51.75,89.75 50,88 48,88 47,87 47,81 48,80 51,80 52,79 52,77 51,76 49.65,76 T1.7 48.1,75.85 47,74.75 47,58 40.25,51.25 40.25,48.34 IC3.27
  Bottom 0.254: K1.3 87.41,91.59 86.75,92.25 81.75,92.25 81.75,90.25 81,89.5 74.75,89.5 74.25,90 74.25,93.27 | 76.02,93.25 LCD_I2C.3 74.25,93.27 | 74.25,93.27 73.48,93.27 71,95.75 69.06,95.75 IMU.4 | v55.25,93.5 v55.25,90
TX
  Top 0.254: K1.8 92.99,86.51 91.75,87.75 88,87.75 84.75,91 84.88,91 GPS.3
UT11-IN
  Top 0.305: K1.40 93.27,45.77 90,42.5 87.26,42.5 R1.1 85.76,41 84,41 83.67,41.33 Q1.2
UT11-OUT
  Top 0.254: Q1.3 83,41.25 | 71,39 71,36.5 70.5,36 67.75,36 67.25,36.5 67.25,37.48 UT1.3
  Top 0.305: Q1.3 84.84,43.92 R2.1 | 83,41.25 82.25,40.5 72.5,40.5 71,39
UT12-IN
  Top 0.305: K1.37 90.73,48.23 87.5,45.25 81.5,45.25 80,44 79.24,44 R15.1 78.76,43.76 78,43 75.47,43 Q7.2
UT12-OUT
  Top 0.254: UT1.4 69.63,38.88 71.25,40.5 71.25,43.25 71.75,43.75 73.83,43.75 Q7.3
  Top 0.305: R16.1 74.16,43.76 Q7.3
UT21-IN
  Top 0.305: K1.38 93.27,48.73 92.5,49.5 89.5,49.5 89,49 89,48 88.5,47.5 87.26,47.5 R4.1 86.24,48 83,48 82.58,47.33 Q2.2
UT21-OUT
  Top 0.254: Q2.3 82,46.5
  Top 0.305: Q2.3 84.84,48.92 R5.1 | 82,46.5 81.5,46 80.5,46 79.5,45
  Top 0.406: 79.5,45 71.75,45 70,43.25 67.75,43.25 67,44 67,45.45 UT2.3
UT22-IN
  Top 0.254: 82,50.5 81.75,50.5 81.5,50.25 81.25,50.25 80,49
  Top 0.305: K1.35 88.95,50.95 88.5,50.5 82,50.5 | 80,49 79.24,49 R17.1 78.76,48.76 78,48 75.58,48 Q8.2
UT22-OUT
  Top 0.305: R18.1 74.16,48.76 Q8.3 71.02,48.92
  Top 0.406: UT2.4 69.63,47.54 71.02,48.92
UT31-IN
  Top 0.254: 92.5,52 87.24,52
  Top 0.305: K1.36 93.27,51.23 92.5,52 | 87.24,52 R6.1 87,52 86,51 83.72,51 Q3.2
UT31-OUT
  Top 0.254: Q3.3 82,51.5 | 81.5,51 81.25,50.75 80.75,50.75 79.75,49.75 69.25,49.75 68,51
  Top 0.305: R7.1 82.16,53.76 Q3.3 | 82,51.5 81.5,51 | 68,51 67,52 67,53.1 UT3.3
UT32-IN
  Top 0.254: R19.1 78.76,53.76 78,53 75.58,53 Q9.2
  Top 0.305: K1.33 90.01,53.49 88.25,55.25 80.49,55.25 R19.1
UT32-OUT
  Top 0.305: R20.1 74.16,53.76 Q9.3 70.36,53.92 UT3.4
UT41-IN
  Top 0.305: K1.31 89.47,56.03 88.5,57 87.24,57 R8.1 87,56.75 86.5,56.25 83.47,56.25 Q4.2
UT41-OUT
  Top 0.305: R9.1 82.16,58.76 Q4.3 82,59 78.75,62.5 68.5,62.5 67,61 67,60.93 UT4.3
UT42-IN
  Top 0.254: K1.32 91.99,54.75 90,54.75 | R21.1 79,56.25 78.25,55.5 75.5,55.5 74.75,56.25 74.75,56.98 Q10.2
  Top 0.305: 90,54.75 89,55.75 79.75,55.75 79,56.5 R21.1
UT42-OUT
  Top 0.305: R22.1 74.16,58.76 Q10.3 71.8,58.92 UT4.4
UT51-IN
  Top 0.305: K1.15 90.35,76.35 89,75 86,75 85,76 R10.1 82.81,76.24 Q5.2
UT51-OUT
  Top 0.254: UT5.3 67.09,70.66 68,69.75 70.75,69.75 73.25,72.25 77.25,72.25 79.5,75 81.75,75 82,75.25 Q5.3
  Top 0.305: R11.1 86.76,77.76 86,77 82.92,77 Q5.3
UT52-IN
  Top 0.254: K1.13 89.11,78.89 88.5,79.5 81.5,79.5 80.89,78.89
  Top 0.305: 80.89,78.89 80,78 79.24,78 R23.1 78.76,77.76 78,77 75.58,77 Q11.2
UT52-OUT
  Top 0.254: 70.9,77.76 70.51,77.76 69.75,77 69.75,71.36 UT5.4 | Q11.3 76.84,77.92 R24.1
  Top 0.305: R24.1 70.9,77.76
UT61-IN
  Top 0.305: K1.12 93.27,81.27 92,80 86.24,80 R13.1 84.84,81.08 Q6.2
UT61-OUT
  Top 0.254: Q6.3 82,80.5 81.75,80.25 81.25,80.25 80.5,79.5 | UT6.3 67.09,79.16 67.75,78.5 70,78.5 71,79.5 72.5,79.5
  Top 0.305: R14.1 86.76,82.76 86,82 82,82 Q6.3 | 80.5,79.5 72.5,79.5
UT62-IN
  Top 0.305: K1.11 90.57,81.43 87.5,84.5 81,84.5 79.5,83 79.24,83 R25.1 78.76,82.76 78,82 75.58,82 Q12.2
UT62-OUT
  Top 0.254: Q12.3 74,83.25 72.75,84.5 70.75,84.5 69.75,83.5 69.75,80.26 UT6.4
  Top 0.305: Q12.3 76.84,82.92 R26.1
VIN  (via drill 0.6)
  Top 0.254: 11.5,27.97 R27.2 11.37,28 | 34,65 30,65 28.5,63.5 25,63.5 24,62.5 24,61 21.75,58.75 18.5,58.75 17.25,60 17.25,62.25 21,66 21,68.75 20.5,69.25 20.5,72.25 21.5,74.25 R29.2
  Top 0.406: RV1.2 40,60.96 40,65 34,65 IC1.4
  Top 0.813: v11.5,27 11.5,27.97 | SWITCH/FUSE.1 6.38,30.37 8.75,28 11.37,28
  Top 2.184: SWITCH/FUSE.1 4.87,15.37 J3.2 6.5,12 32,12 34.5,14.5 J1.2 40.5,14.5 43,12 68,12 J5.2
  Bottom 0.254: 16,28 16,41 21,46 21,47 31,57 31,64 32,65 IC1.4 34,65
  Bottom 0.813: v11.5,27 15,27 16,28 16,29.73 C15.1

## Text on the board
TopSilkscreen: IMU | LDC-I2C | GPS | C4 | RTC | SCL | 5V | R3 | R12 | SDA | Y2 | SCL | SDA | GND | C2 | USB-POWER-1 | GND | 5V | TX | C14 | RX | 3v3 | GND | C16 | GND | C3 | R13 | G4 | R14 | DS18 | GND | 5V | G18 | G17 | BATTERY+ | 5V | T12 | T6 | R26 | R25 | SCL | C12 | LOW VOLTAGE INDICATION (Vin) | SDA | GND | UT-6 | T11 | R24 | R23 | T5 | R11 | LM324 | GND | 5V | G22 | G27 | R10 | 5V | 5V | G23 | USB-POWER-2 | GND | CE0 | G24 | D3 | D2 | LV LED | CLK | CLK | SPI | UT-5 | BUTTONS | C17 | SET-POINT | G25 | C11 | MISO | THERMAL CAMERA | MISO | GND | 5V | G6 | G12 | MOSI | MOSI | CE0 | R22 | R21 | R9 | R8 | C10 | TEST-POINT | UT-4 | GND | 5V | G16 | G13 | T10 | T4 | R7 | R6 | R20 | R19 | ATMEGA8 | RST-AVR | T9 | T3 | 7V-24V | VCC | C9 | UT-3 | R18 | R17 | R5 | R4 | A0 | A1 | PROGRAMMING: SPI | ATMEGA8 | GND | 5V | G20 | G19 | A2 | A3 | T8 | R16 | R15 | T2 | R2 | R1 | mosi miso clk gpio5 / 3v3 gnd | R30 | D1 | A6 | A7 | GND | COMMUNICATION : I2C | C8 | UT-2 | 8MHZ | 5V | 3V | T7 | T1 | GND | 5V | G21 | G26 | G G | SWITCH | GND | 5V | SWITCH/FUSE | C15 | LED | LM1117-3V3 | D5 | D6 | D7 | D8 | D9 | D10 | UT-1 | C13 | C7 | EXT | 5V | INT | C1 | 3V3 | LED | R27 | GND | SELECT 5V | USB-POWER-1 | USB-POWER-2 | BOARD POWER | VIN | 5V | VIN | 5V | VIN | 5V | INPUT | OUTPUT | INPUT | OUTPUT | INPUT | OUTPUT | GND | GND | GND | GND | GND | GND
top_silk: UBEC/BUCK 5V | UBEC/BUCK 5V | UBEC/BUCK 5V